# EAGLE board vader_panel (EAGLE 7.4.0)
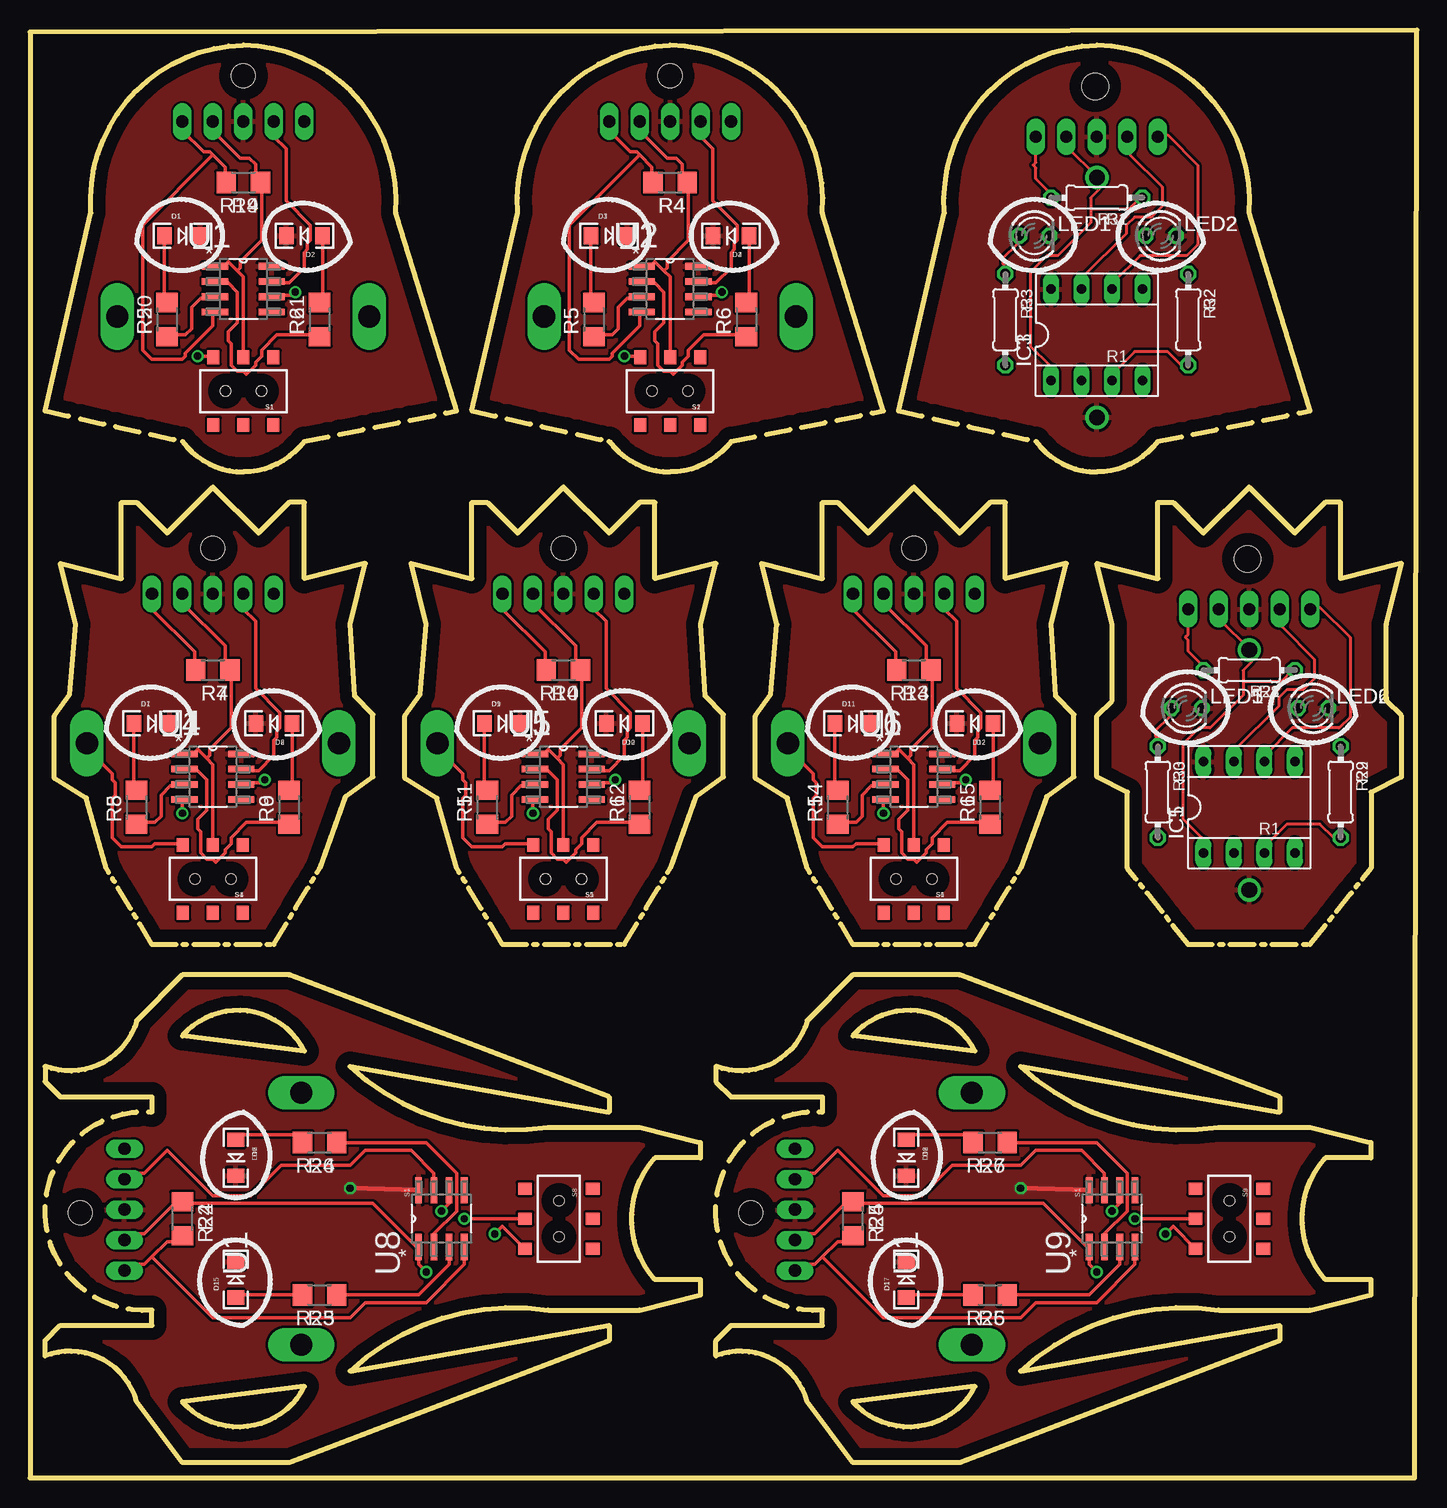
[diagram p0: board, top side]
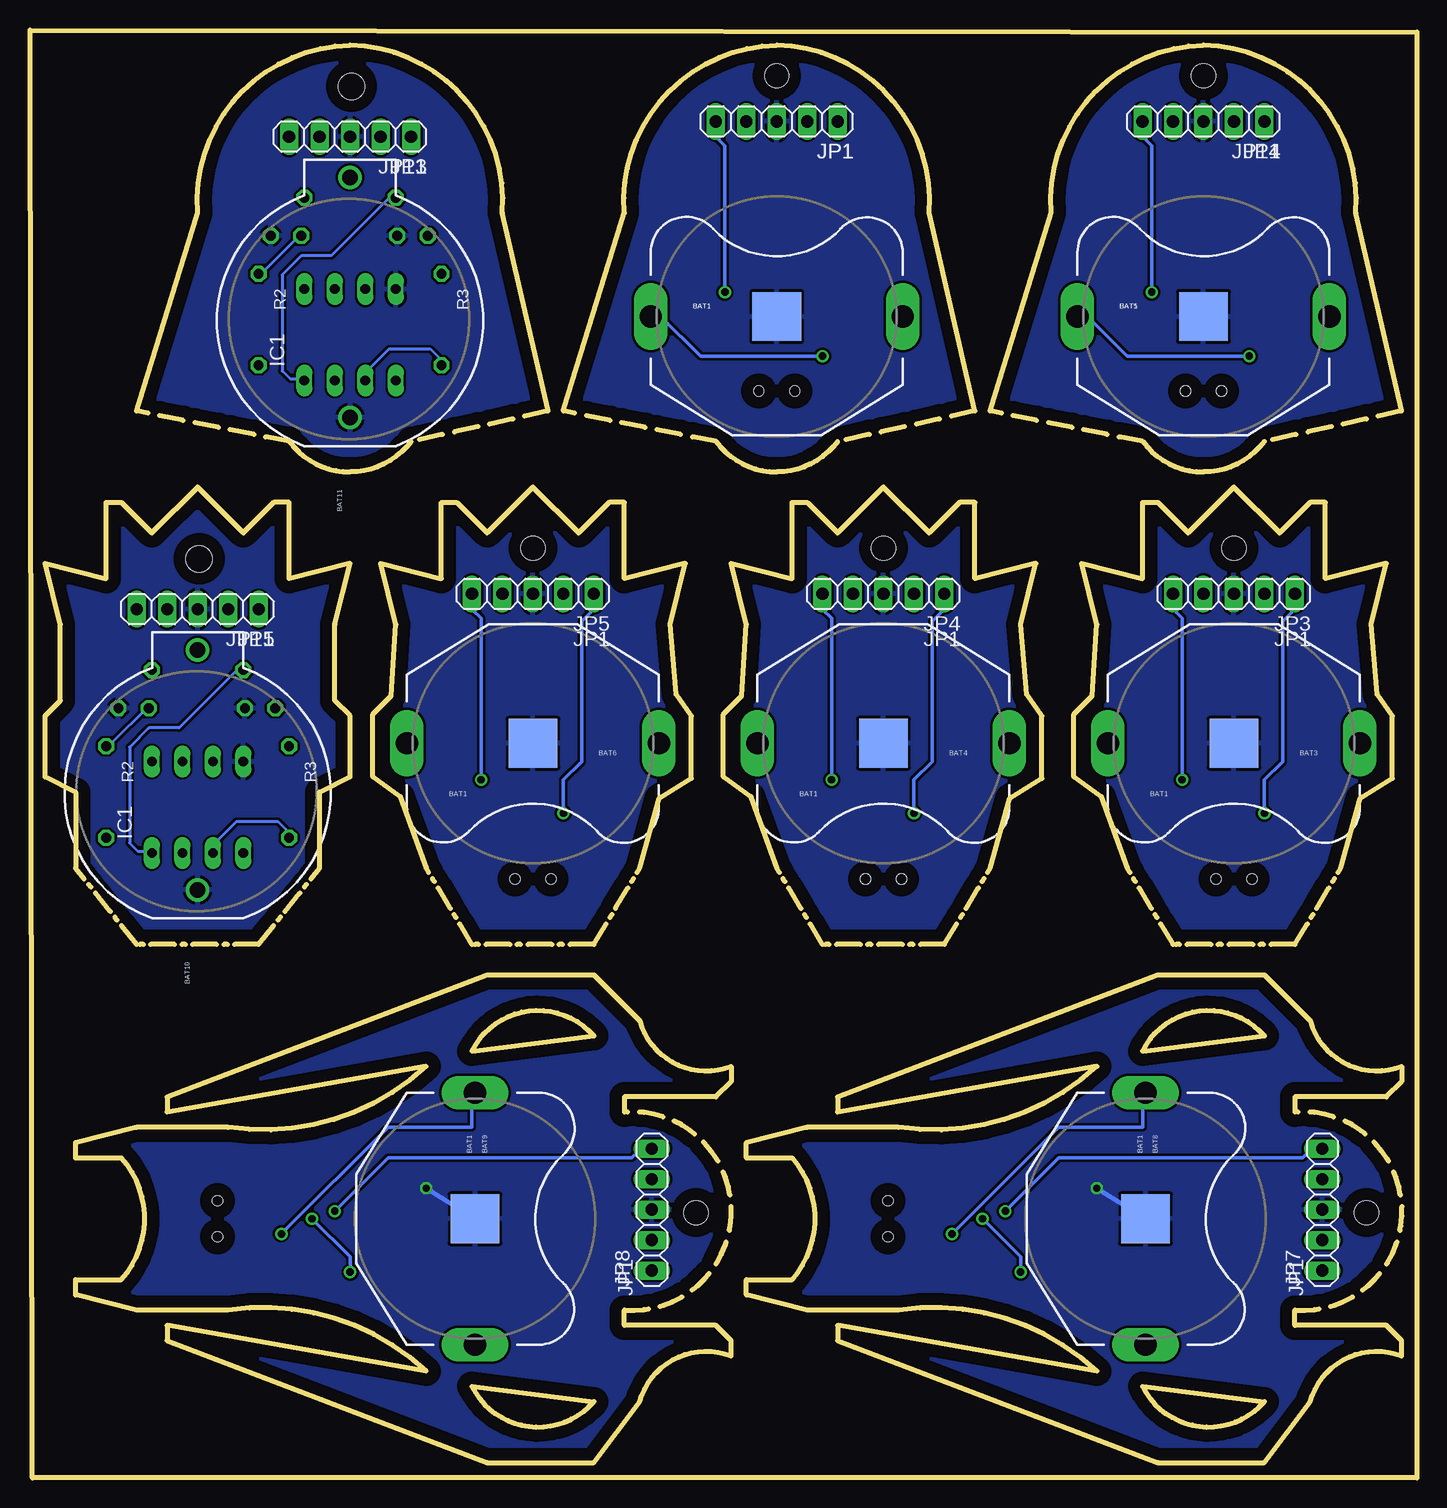
[diagram p1: board, bottom side, seen from below]

Size 115.57 x 120.65 mm. Coordinates in mm from the lower left corner, seen from the top.
Outline: 0,0 115.38,0 115.57,120.65 0,120.48 0,0
Outline: 1.27,88.9 12.7,86.36 arc53 17.78,83.82 arc53 22.86,86.36 35.56,88.9 30.48,105.41 arc93 17.78,119.38 arc93 5.08,105.41 1.27,88.9
Outline: 36.83,88.9 48.26,86.36 arc53 53.34,83.82 arc53 58.42,86.36 71.12,88.9 66.04,105.41 arc93 53.34,119.38 arc93 40.64,105.41 36.83,88.9
Outline: 27.94,76.2 22.86,74.93 22.86,81.28 21.59,81.28 19.05,78.74 15.24,82.55 11.43,78.74 8.89,81.28 7.62,81.28 7.62,74.93 2.54,76.2 3.81,71.12 3.3,65.28 2.03,63.5 2.03,58.29 4.7,56.64 6.35,50.8 10.16,44.45 20.32,44.45 24.13,50.8 26.29,56.77 28.57,58.42 28.57,63.63 27.05,65.15 26.67,71.12 27.94,76.2
Outline: 57.15,76.2 52.07,74.93 52.07,81.28 50.8,81.28 48.26,78.74 44.45,82.55 40.64,78.74 38.1,81.28 36.83,81.28 36.83,74.93 31.75,76.2 33.02,71.12 32.51,65.28 31.24,63.5 31.24,58.29 33.91,56.64 35.56,50.8 39.37,44.45 49.53,44.45 53.34,50.8 55.5,56.77 57.78,58.42 57.78,63.63 56.26,65.15 55.88,71.12 57.15,76.2
Outline: 86.36,76.2 81.28,74.93 81.28,81.28 80.01,81.28 77.47,78.74 73.66,82.55 69.85,78.74 67.31,81.28 66.04,81.28 66.04,74.93 60.96,76.2 62.23,71.12 61.72,65.28 60.45,63.5 60.45,58.29 63.12,56.64 64.77,50.8 68.58,44.45 78.74,44.45 82.55,50.8 84.71,56.77 87,58.42 87,63.63 85.47,65.15 85.09,71.12 86.36,76.2
Outline: 8.89,38.1 arc-95 1.27,34.29 1.27,33.02 2.54,31.75 10.16,31.75 10.16,30.48 arc189 10.16,13.97 10.16,12.7 2.54,12.7 1.27,11.43 1.27,10.16 arc-95 8.89,6.35 12.7,1.27 21.59,1.27 48.26,11.43 48.26,12.7 26.67,8.89 arc-51 43.18,13.97 50.8,13.97 55.88,15.24 55.88,16.51 52.07,16.51 arc-83 52.07,26.67 55.88,26.67 55.88,27.94 50.8,29.21 43.18,29.21 arc-51 26.67,34.29 48.26,30.48 48.26,31.75 21.59,41.91 12.7,41.91 8.89,38.1
Outline: 22.86,35.56 12.7,36.83 arc-112 22.86,35.56
Outline: 22.86,7.62 12.7,6.35 arc112 22.86,7.62
Outline: 64.77,38.1 arc-95 57.15,34.29 57.15,33.02 58.42,31.75 66.04,31.75 66.04,30.48 arc189 66.04,13.97 66.04,12.7 58.42,12.7 57.15,11.43 57.15,10.16 arc-95 64.77,6.35 68.58,1.27 77.47,1.27 104.14,11.43 104.14,12.7 82.55,8.89 arc-51 99.06,13.97 106.68,13.97 111.76,15.24 111.76,16.51 107.95,16.51 arc-83 107.95,26.67 111.76,26.67 111.76,27.94 106.68,29.21 99.06,29.21 arc-51 82.55,34.29 104.14,30.48 104.14,31.75 77.47,41.91 68.58,41.91 64.77,38.1
Outline: 78.74,35.56 68.58,36.83 arc-112 78.74,35.56
Outline: 78.74,7.62 68.58,6.35 arc112 78.74,7.62
Outline: 114.3,76.2 109.22,74.93 109.22,81.28 107.95,81.28 105.41,78.74 101.6,82.55 97.79,78.74 95.25,81.28 93.98,81.28 93.98,74.93 88.9,76.2 90.17,71.12 90.17,64.77 88.9,63.5 88.9,58.42 91.44,57.15 91.44,50.8 96.52,44.45 106.68,44.45 111.76,50.8 111.76,57.15 114.3,58.42 114.3,63.5 113.03,64.77 113.03,71.12 114.3,76.2
Outline: 72.39,88.9 83.82,86.36 arc53 88.9,83.82 arc53 93.98,86.36 106.68,88.9 101.6,105.41 arc93 88.9,119.38 arc93 76.2,105.41 72.39,88.9
Copper layers (1*16): Top 0.035mm / dielectric 1.5mm / Bottom 0.035mm
Design rules "default": minimum track width 10mil, minimum drill 24mil, track to track 8mil, track to pad 8mil, pad to pad 8mil, via to via 8mil, smd to smd 8mil, copper to edge 40mil, drill to drill 8mil, minimum pad ring 10mil, minimum via ring 8mil, stop-mask expansion 4mil, vias tented up to drill 0mil, thermal gap 10mil
Holes 2 mm at 17.78,116.84 53.34,116.84 15.24,77.47 44.45,77.47 73.66,77.47 4.19,22.1 60.07,22.1
Holes 2.2 mm at 101.47,76.58 88.77,115.95

## Footprints (pad centres in the part's own frame; a part is rotated, then mirrored left to right if it is on the bottom)
BATTERY_20MM_PTH_COMPACT = drill 1.854 long: 1 -10.5,0; 3 10.5,0 | smd 4.064 x 4.064: 2 0,0
BATTCOM_20MM_PTH = drill 1.3: 1 11.85,0; 2 -8.15,0
LED-1206 = smd 1.2 x 1.4: A -1.5,0; C 1.5,0
SOCKET-08 = drill 0.813 long: 1 -3.81,-3.81; 2 -1.27,-3.81; 3 1.27,-3.81; 4 3.81,-3.81; 5 3.81,3.81; 6 1.27,3.81; 7 -1.27,3.81; 8 -3.81,3.81
1X05 = drill 1.016 long: 1 -5.08,0; 2 -2.54,0; 3 0,0; 4 2.54,0; 5 5.08,0
LED3MM = drill 0.813 octagon: A -1.27,0; K 1.27,0
R1206 = smd 1.6 x 1.803: 1 -1.422,0; 2 1.422,0
0204/7 = drill 0.813 octagon: 1 -3.81,0; 2 3.81,0
AYZ0202 = smd 1 x 1.15: 1 -2.5,2.825; 2 0,2.825; 3 2.5,2.825; 4 -2.5,-2.825; 5 0,-2.825; 6 2.5,-2.825 | hole 0.85: 1.5,0; -1.5,0
SOIC127P600X175-8N = smd 2.184 x 0.559: 1 -2.362,1.905; 2 -2.362,0.635; 3 -2.362,-0.635; 4 -2.362,-1.905; 5 2.362,-1.905; 6 2.362,-0.635; 7 2.362,0.635; 8 2.362,1.905

## Placement (x,y rotation side)
BAT1  [BATTERY_20MM_PTH_COMPACT]  53.34,96.77 0 bottom
BAT3  [BATTERY_20MM_PTH_COMPACT]  15.24,61.21 180 bottom
BAT4  [BATTERY_20MM_PTH_COMPACT]  44.45,61.21 180 bottom
BAT5  [BATTERY_20MM_PTH_COMPACT]  17.78,96.77 0 bottom
BAT6  [BATTERY_20MM_PTH_COMPACT]  73.66,61.21 180 bottom
BAT8  [BATTERY_20MM_PTH_COMPACT]  22.61,21.59 270 bottom
BAT9  [BATTERY_20MM_PTH_COMPACT]  78.49,21.59 270 bottom
BAT10  [BATTCOM_20MM_PTH]  101.6,57.15 90 bottom
BAT11  [BATTCOM_20MM_PTH]  88.9,96.52 90 bottom
D1  [LED-1206]  12.7,103.5 0 top
D2  [LED-1206]  22.86,103.5 180 top
D3  [LED-1206]  48.26,103.5 0 top
D4  [LED-1206]  58.42,103.5 180 top
D7  [LED-1206]  10.16,62.86 0 top
D8  [LED-1206]  20.32,62.86 180 top
D9  [LED-1206]  39.37,62.86 0 top
D10  [LED-1206]  49.53,62.86 180 top
D11  [LED-1206]  68.58,62.86 0 top
D12  [LED-1206]  78.74,62.86 180 top
D15  [LED-1206]  17.14,16.51 90 top
D16  [LED-1206]  17.14,26.67 270 top
D17  [LED-1206]  73.03,16.51 90 top
D18  [LED-1206]  73.03,26.67 270 top
IC3  [SOCKET-08]  88.9,95.25 0 top
IC5  [SOCKET-08]  101.6,55.88 0 top
JP1  [1X05]  53.34,113.03 180 bottom
JP3  [1X05]  15.24,73.66 180 bottom
JP4  [1X05]  44.45,73.66 180 bottom
JP5  [1X05]  73.66,73.66 180 bottom
JP7  [1X05]  7.87,22.35 90 bottom
JP8  [1X05]  63.75,22.35 90 bottom
JP13  [1X05]  88.9,111.76 180 bottom
JP14  [1X05]  17.78,113.03 180 bottom
JP15  [1X05]  101.6,72.39 180 bottom
LED1  [LED3MM]  83.69,103.5 0 top
LED2  [LED3MM]  94.23,103.5 0 top
LED5  [LED3MM]  96.39,64.14 0 top
LED6  [LED3MM]  106.93,64.14 0 top
R4  [R1206]  53.34,107.95 180 top
R5  [R1206]  46.99,96.52 90 top
R6  [R1206]  59.69,96.52 90 top
R7  [R1206]  15.24,67.31 180 top
R8  [R1206]  8.89,55.88 90 top
R9  [R1206]  21.59,55.88 90 top
R10  [R1206]  44.45,67.31 180 top
R11  [R1206]  38.1,55.88 90 top
R12  [R1206]  50.8,55.88 90 top
R13  [R1206]  73.66,67.31 180 top
R14  [R1206]  67.31,55.88 90 top
R15  [R1206]  80.01,55.88 90 top
R19  [R1206]  17.78,107.95 180 top
R20  [R1206]  11.43,96.52 90 top
R21  [R1206]  24.13,96.52 90 top
R22  [R1206]  12.7,21.59 270 top
R23  [R1206]  24.13,15.24 180 top
R24  [R1206]  24.13,27.94 180 top
R25  [R1206]  68.58,21.59 270 top
R26  [R1206]  80.01,15.24 180 top
R27  [R1206]  80.01,27.94 180 top
R28  [0204/7]  101.6,67.31 180 top
R29  [0204/7]  109.22,57.15 270 top
R30  [0204/7]  93.98,57.15 270 top
R31  [0204/7]  88.9,106.68 180 top
R32  [0204/7]  96.52,96.52 270 top
R33  [0204/7]  81.28,96.52 270 top
S1  AYZ0202  [AYZ0202]  17.78,90.55 180 top
S2  AYZ0202  [AYZ0202]  53.34,90.55 180 top
S4  AYZ0202  [AYZ0202]  15.24,49.91 180 top
S5  AYZ0202  [AYZ0202]  44.45,49.91 180 top
S6  AYZ0202  [AYZ0202]  73.66,49.91 180 top
S8  AYZ0202  [AYZ0202]  44.07,21.59 270 top
S9  AYZ0202  [AYZ0202]  99.95,21.59 270 top
U1  PIC12F1822-I/SN  [SOIC127P600X175-8N]  17.78,99.06 0 top
U2  PIC12F1822-I/SN  [SOIC127P600X175-8N]  53.34,99.06 0 top
U4  PIC12F1822-I/SN  [SOIC127P600X175-8N]  15.24,58.42 0 top
U5  PIC12F1822-I/SN  [SOIC127P600X175-8N]  44.45,58.42 0 top
U6  PIC12F1822-I/SN  [SOIC127P600X175-8N]  73.66,58.42 0 top
U8  PIC12F1822-I/SN  [SOIC127P600X175-8N]  34.29,21.59 90 top
U9  PIC12F1822-I/SN  [SOIC127P600X175-8N]  90.17,21.59 90 top

## Library data of the parts
BAT1 BAT3-BAT6 BAT8-BAT11 = SparkFun-Electromechanical
D1-D4 D7-D12 D15-D18 = SparkFun-LED
IC3 IC5 = ic-package
JP1 JP3-JP5 JP7 JP8 JP13-JP15 = pinhead
LED1 LED2 LED5 LED6 = led
R4-R15 R19-R33 = resistor
S1 S2 S4-S6 S8 S9 = SparkFun-Electromechanical; PROD_ID: SWCH-08179
U1 U2 U4-U6 U8 U9 = PIC12F1822ISN; MPN: PIC12F1822-I/SN; OC_FARNELL: 1971857; OC_NEWARK: 53R0197; PACKAGE: SOIC-8; SUPPLIER: Microchip

## Nets
GND: BAT1.2 D3.C D4.C JP1.3 U2.8
GND2: BAT3.2 D7.C D8.C JP3.3 U4.8
GND3: BAT4.2 D9.C D10.C JP4.3 U5.8
GND4: BAT5.2 D1.C D2.C JP14.3 U1.8
GND5: BAT6.2 D11.C D12.C JP5.3 U6.8
GND7: BAT8.2 D15.C D16.C JP7.3 U8.8
GND8: BAT9.2 D17.C D18.C JP8.3 U9.8
GND9: BAT10.2 IC5.8 JP15.3 LED5.K LED6.K
GND10: BAT11.2 IC3.8 JP13.3 LED1.K LED2.K
ICSPCLK: JP1.5 U2.6
ICSPCLK2: JP3.5 U4.6
ICSPCLK3: JP4.5 U5.6
ICSPCLK4: JP14.5 U1.6
ICSPCLK5: JP5.5 U6.6
ICSPCLK7: JP7.5 U8.6
ICSPCLK8: JP8.5 U9.6
ICSPCLK9: IC5.6 JP15.5
ICSPCLK10: IC3.6 JP13.5
ICSPDAT: JP1.4 U2.7
ICSPDAT2: JP3.4 U4.7
ICSPDAT3: JP4.4 U5.7
ICSPDAT4: JP14.4 U1.7
ICSPDAT5: JP5.4 U6.7
ICSPDAT7: JP7.4 U8.7
ICSPDAT8: JP8.4 U9.7
ICSPDAT9: IC5.7 JP15.4
ICSPDAT10: IC3.7 JP13.4
N$1: BAT1.1 S2.6
N$4: R6.1 U2.2
N$5: R5.1 U2.3
N$6: D4.A R6.2
N$7: D3.A R5.2
N$11: R9.1 U4.2
N$12: R8.1 U4.3
N$13: D8.A R9.2
N$14: D7.A R8.2
N$15: BAT3.1 S4.6
N$16: R12.1 U5.2
N$17: R11.1 U5.3
N$18: D10.A R12.2
N$19: D9.A R11.2
N$20: BAT4.1 S5.6
N$21: R15.1 U6.2
N$22: R21.1 U1.2
N$23: R20.1 U1.3
N$24: D2.A R21.2
N$25: D1.A R20.2
N$26: BAT5.1 S1.6
N$27: R14.1 U6.3
N$29: D12.A R15.2
N$30: D11.A R14.2
N$31: BAT6.1 S6.6
N$37: R24.1 U8.2
N$38: R23.1 U8.3
N$39: D16.A R24.2
N$40: D15.A R23.2
N$41: BAT8.1 S8.6
N$42: R27.1 U9.2
N$43: R26.1 U9.3
N$44: D18.A R27.2
N$45: D17.A R26.2
N$46: BAT9.1 S9.6
N$47: IC5.4 JP15.1 R28.2
N$48: IC5.3 R29.2
N$49: IC5.2 R30.2
N$50: LED5.A R30.1
N$51: LED6.A R29.1
N$52: IC3.4 JP13.1 R31.2
N$53: IC3.3 R32.2
N$54: IC3.2 R33.2
N$55: LED1.A R33.1
N$56: LED2.A R32.1
VDD: JP1.2 R4.1 S2.5 U2.1
VDD2: JP3.2 R7.1 S4.5 U4.1
VDD3: JP4.2 R10.1 S5.5 U5.1
VDD4: JP14.2 R19.1 S1.5 U1.1
VDD5: JP5.2 R13.1 S6.5 U6.1
VDD7: JP7.2 R22.1 S8.5 U8.1
VDD8: JP8.2 R25.1 S9.5 U9.1
VDD9: BAT10.1 IC5.1 JP15.2 R28.1
VDD10: BAT11.1 IC3.1 JP13.2 R31.1
VPP: JP14.1 R19.2 U1.4
VPP1: JP1.1 R4.2 U2.4
VPP3: JP3.1 R7.2 U4.4
VPP4: JP4.1 R10.2 U5.4
VPP5: JP5.1 R13.2 U6.4
VPP7: JP7.1 R22.2 U8.4
VPP8: JP8.1 R25.2 U9.4

## Tracks (layer width: path | path; a pad name or v marks a point on that pad's centre or on a via)
GND
  pour Top: 36.83,83.82 71.12,83.82 71.12,119.38 36.83,119.38
  pour Bottom: 71.12,83.82 36.83,83.82 36.83,119.38 71.12,119.38
GND2
  pour Top: 1.27,43.18 29.21,43.18 29.21,82.55 1.27,82.55
  pour Bottom: 29.21,43.18 1.27,43.18 1.27,82.55 29.21,82.55
GND3
  pour Top: 30.48,43.18 58.42,43.18 58.42,82.55 30.48,82.55
  pour Bottom: 58.42,43.18 30.48,43.18 30.48,82.55 58.42,82.55
GND4
  pour Top: 1.27,83.82 35.56,83.82 35.56,119.38 1.27,119.38
  pour Bottom: 35.56,83.82 1.27,83.82 1.27,119.38 35.56,119.38
GND5
  pour Top: 59.69,43.18 87.63,43.18 87.63,82.55 59.69,82.55
  pour Bottom: 87.63,43.18 59.69,43.18 59.69,82.55 87.63,82.55
GND7  (via drill 0.6)
  Top 0.406: U8.8 v26.67,24.13
  Bottom 0.406: v26.67,24.13 BAT8.2
  pour Top: 55.88,1.27 55.88,41.91 1.27,41.91 1.27,1.27
  pour Bottom: 55.88,41.91 55.88,1.27 1.27,1.27 1.27,41.91
GND8  (via drill 0.6)
  Top 0.406: U9.8 v82.55,24.13
  Bottom 0.406: v82.55,24.13 BAT9.2
  pour Top: 111.76,1.27 111.76,41.91 57.15,41.91 57.15,1.27
  pour Bottom: 111.76,41.91 111.76,1.27 57.15,1.27 57.15,41.91
GND9
  pour Top: 88.9,44.45 114.3,44.45 114.3,82.55 88.9,82.55
  pour Bottom: 88.9,44.45 114.3,44.45 114.3,82.55 88.9,82.55
GND10
  pour Top: 72.39,83.82 106.68,83.82 106.68,119.38 72.39,119.38
  pour Bottom: 72.39,83.82 106.68,83.82 106.68,119.38 72.39,119.38
ICSPCLK  (via drill 0.61)
  Top 0.305: v57.66,98.81 57.4,98.55 55.88,98.55 U2.6
  Bottom 0.305: v57.66,98.81 57.66,111 58.42,111.76 JP1.5
ICSPCLK2  (via drill 0.61)
  Top 0.305: v19.56,58.17 19.3,57.91 17.78,57.91 U4.6
  Bottom 0.305: v19.56,58.17 19.56,71.63 20.32,72.39 JP3.5
ICSPCLK3  (via drill 0.61)
  Top 0.305: v48.77,58.17 48.51,57.91 46.99,57.91 U5.6
  Bottom 0.305: v48.77,58.17 48.77,71.63 49.53,72.39 JP4.5
ICSPCLK4  (via drill 0.61)
  Top 0.305: v22.1,98.81 21.84,98.55 20.32,98.55 U1.6
  Bottom 0.305: v22.1,98.81 22.1,111 22.86,111.76 JP14.5
ICSPCLK5  (via drill 0.61)
  Top 0.305: v77.98,58.17 77.72,57.91 76.2,57.91 U6.6
  Bottom 0.305: v77.98,58.17 77.98,71.63 78.74,72.39 JP5.5
ICSPCLK7  (via drill 0.61)
  Top 0.305: U8.6 34.92,22.86 v34.29,22.23
  Bottom 0.305: v34.29,22.23 29.84,26.67 9.53,26.67 8.26,27.94 JP7.5
ICSPCLK8  (via drill 0.61)
  Top 0.305: U9.6 90.81,22.86 v90.17,22.23
  Bottom 0.305: v90.17,22.23 85.73,26.67 65.41,26.67 64.14,27.94 JP8.5
ICSPCLK9
  Top 0.254: IC5.6 102.92,59.74 102.92,60.2 105.21,62.48 109.09,62.48 110.01,63.4 110.01,70.03 107.49,72.54 106.81,72.54 JP15.5
ICSPCLK10
  Top 0.254: IC3.6 90.22,99.11 90.22,99.57 92.51,101.85 96.39,101.85 97.31,102.77 97.31,109.4 94.79,111.91 94.11,111.91 JP13.5
ICSPDAT
  Top 0.305: JP1.4 55.88,111.76 56.9,110.74 56.9,106.43 58.93,104.39 58.93,103.12 58.67,102.87 58.67,102.36 58.42,102.11 58.42,100.84 57.15,99.57 55.88,99.57 U2.7
ICSPDAT2
  Top 0.305: JP3.4 17.78,72.39 18.8,71.37 18.8,65.79 20.83,63.75 20.83,62.48 20.57,62.23 20.57,61.72 20.32,61.47 20.32,60.2 19.05,58.93 17.78,58.93 U4.7
ICSPDAT3
  Top 0.305: JP4.4 46.99,72.39 48.01,71.37 48.01,65.79 50.04,63.75 50.04,62.48 49.78,62.23 49.78,61.72 49.53,61.47 49.53,60.2 48.26,58.93 46.99,58.93 U5.7
ICSPDAT4
  Top 0.305: JP14.4 20.32,111.76 21.34,110.74 21.34,106.43 23.37,104.39 23.37,103.12 23.11,102.87 23.11,102.36 22.86,102.11 22.86,100.84 21.59,99.57 20.32,99.57 U1.7
ICSPDAT5
  Top 0.305: JP5.4 76.2,72.39 77.22,71.37 77.22,65.79 79.25,63.75 79.25,62.48 78.99,62.23 78.99,61.72 78.74,61.47 78.74,60.2 77.47,58.93 76.2,58.93 U6.7
ICSPDAT7
  Top 0.305: U8.7 33.65,25.4 31.75,27.3 27.94,27.3 26.67,26.04 20.96,26.04 18.41,23.5 15.24,23.5 11.43,27.3 9.53,25.4 8.26,25.4 JP7.4
ICSPDAT8
  Top 0.305: U9.7 89.54,25.4 87.63,27.3 83.82,27.3 82.55,26.04 76.84,26.04 74.3,23.5 71.12,23.5 67.31,27.3 65.41,25.4 64.14,25.4 JP8.4
ICSPDAT9
  Top 0.254: IC5.7 100.41,59.74 100.41,60.66 104.06,64.31 104.06,65 104.75,65.68 106.12,65.68 107.04,66.6 107.04,68.2 104.29,70.94 104.29,72.31 JP15.4
ICSPDAT10
  Top 0.254: IC3.7 87.71,99.11 87.71,100.02 91.36,103.68 91.36,104.37 92.05,105.05 93.42,105.05 94.34,105.97 94.34,107.57 91.59,110.31 91.59,111.68 JP13.4
N$1  (via drill 0.61)
  Top 0.305: v49.53,93.47 50.8,93.47 S2.6
  Bottom 0.305: v49.53,93.47 59.69,93.47 62.99,96.77 BAT1.1
N$4
  Top 0.305: R6.1 59.69,95.25 56.13,95.25 54.86,93.98 54.86,93.47 54.36,92.96 54.36,92.71 53.59,91.95 53.34,92.2 52.83,92.2 52.32,92.71 52.32,94.49 52.07,94.74 52.07,95.5 52.83,96.27 52.83,98.81 52.07,99.57 51.05,99.57 U2.2
N$5
  Top 0.305: R5.1 46.99,95.25 48.51,95.25 49.02,95.76 49.02,97.54 49.78,98.3 50.8,98.3 U2.3
N$6
  Top 0.305: D4.A 59.94,103.38 59.94,98.3 59.69,98.04 R6.2
N$7
  Top 0.305: D3.A 46.74,103.38 46.74,98.3 46.99,98.04 R5.2
N$11
  Top 0.305: R9.1 21.59,54.61 18.03,54.61 16.76,53.34 16.76,52.83 16.26,52.32 16.26,52.07 15.49,51.31 15.24,51.56 14.73,51.56 14.22,52.07 14.22,53.85 13.97,54.1 13.97,54.86 14.73,55.63 14.73,58.17 13.97,58.93 12.95,58.93 U4.2
N$12
  Top 0.305: R8.1 8.89,54.61 10.41,54.61 10.92,55.12 10.92,56.9 11.68,57.66 12.7,57.66 U4.3
N$13
  Top 0.305: D8.A 21.84,62.74 21.84,57.66 21.59,57.4 R9.2
N$14
  Top 0.305: D7.A 8.64,62.74 8.64,57.66 8.89,57.4 R8.2
N$15
  Top 0.305: S4.6 12.7,52.83 10.41,52.83 10.16,52.58 7.62,52.58 6.86,53.34 6.86,56.64 7.11,56.9 7.11,57.91 6.86,58.17 6.86,58.67 4.83,60.71 4.83,61.21 BAT3.1
N$16
  Top 0.305: R12.1 50.8,54.61 47.24,54.61 45.97,53.34 45.97,52.83 45.47,52.32 45.47,52.07 44.7,51.31 44.45,51.56 43.94,51.56 43.43,52.07 43.43,53.85 43.18,54.1 43.18,54.86 43.94,55.63 43.94,58.17 43.18,58.93 42.16,58.93 U5.2
N$17
  Top 0.305: R11.1 38.1,54.61 39.62,54.61 40.13,55.12 40.13,56.9 40.89,57.66 41.91,57.66 U5.3
N$18
  Top 0.305: D10.A 51.05,62.74 51.05,57.66 50.8,57.4 R12.2
N$19
  Top 0.305: D9.A 37.85,62.74 37.85,57.66 38.1,57.4 R11.2
N$20
  Top 0.305: S5.6 41.91,52.83 39.62,52.83 39.37,52.58 36.83,52.58 36.07,53.34 36.07,56.64 36.32,56.9 36.32,57.91 36.07,58.17 36.07,58.67 34.04,60.71 34.04,61.21 BAT4.1
N$21
  Top 0.305: R15.1 80.01,54.61 76.45,54.61 75.18,53.34 75.18,52.83 74.68,52.32 74.68,52.07 73.91,51.31 73.66,51.56 73.15,51.56 72.64,52.07 72.64,53.85 72.39,54.1 72.39,54.86 73.15,55.63 73.15,58.17 72.39,58.93 71.37,58.93 U6.2
N$22
  Top 0.305: R21.1 24.13,95.25 20.57,95.25 19.3,93.98 19.3,93.47 18.8,92.96 18.8,92.71 18.03,91.95 17.78,92.2 17.27,92.2 16.76,92.71 16.76,94.49 16.51,94.74 16.51,95.5 17.27,96.27 17.27,98.81 16.51,99.57 15.49,99.57 U1.2
N$23
  Top 0.305: R20.1 11.43,95.25 12.95,95.25 13.46,95.76 13.46,97.54 14.22,98.3 15.24,98.3 U1.3
N$24
  Top 0.305: D2.A 24.38,103.38 24.38,98.3 24.13,98.04 R21.2
N$25
  Top 0.305: D1.A 11.18,103.38 11.18,98.3 11.43,98.04 R20.2
N$26  (via drill 0.61)
  Top 0.305: v13.97,93.47 15.24,93.47 S1.6
  Bottom 0.305: v13.97,93.47 24.13,93.47 27.43,96.77 BAT5.1
N$27
  Top 0.305: R14.1 67.31,54.61 68.83,54.61 69.34,55.12 69.34,56.9 70.1,57.66 71.12,57.66 U6.3
N$29
  Top 0.305: D12.A 80.26,62.74 80.26,57.66 80.01,57.4 R15.2
N$30
  Top 0.305: D11.A 67.06,62.74 67.06,57.66 67.31,57.4 R14.2
N$31
  Top 0.305: S6.6 71.12,52.83 68.83,52.83 68.58,52.58 66.04,52.58 65.28,53.34 65.28,56.64 65.53,56.9 65.53,57.91 65.28,58.17 65.28,58.67 63.25,60.71 63.25,61.21 BAT6.1
N$37
  Top 0.305: R24.1 33.02,27.94 35.56,25.4 35.56,22.23 33.65,20.32 U8.2
N$38
  Top 0.305: R23.1 32.38,15.24 34.92,17.78 U8.3
N$39
  Top 0.305: D16.A 17.14,28.58 22.23,28.58 22.86,27.94 R24.2
N$40
  Top 0.305: R23.2 17.14,15.24 D15.A
N$41  (via drill 0.61)
  Top 0.305: v38.73,20.32 39.37,20.96 41.27,19.05 S8.6
  Bottom 0.305: v38.73,20.32 29.84,29.21 22.86,29.21 22.86,31.75 BAT8.1
N$42
  Top 0.305: R27.1 88.9,27.94 91.44,25.4 91.44,22.23 89.54,20.32 U9.2
N$43
  Top 0.305: R26.1 88.27,15.24 90.81,17.78 U9.3
N$44
  Top 0.305: D18.A 73.03,28.58 78.11,28.58 78.74,27.94 R27.2
N$45
  Top 0.305: R26.2 73.03,15.24 D17.A
N$46  (via drill 0.61)
  Top 0.305: v94.62,20.32 95.25,20.96 97.16,19.05 S9.6
  Bottom 0.305: v94.62,20.32 85.73,29.21 78.74,29.21 78.74,31.75 BAT9.1
N$47
  Top 0.254: JP15.1 96.52,70.26 96.29,70.03 96.52,69.8 96.52,68.89 97.89,67.51 R28.2
  Bottom 0.254: IC5.4 105.44,52.2 106.58,52.2 107.26,52.88 107.26,60.88 105.66,62.48 103.15,62.48 98.35,67.28 97.89,67.28 R28.2
N$48
  Top 0.254: R29.2 108.64,53.34 107.49,54.48 104.75,54.48 102.92,52.65 102.92,52.2 IC5.3
N$49
  Bottom 0.254: R30.2 94.01,53.34 94.01,53.8 94.92,54.71 98.35,54.71 100.18,52.88 100.18,52.2 IC5.2
N$50
  Top 0.254: R30.1 94.01,61.11 94.01,61.57 93.78,61.8 93.78,62.25 94.92,63.4 94.92,64.08 LED5.A
N$51
  Bottom 0.254: R29.1 109.09,61.11 108.86,61.11 105.66,64.31 LED6.A
N$52
  Top 0.254: JP13.1 83.82,109.63 83.59,109.4 83.82,109.17 83.82,108.25 85.19,106.88 R31.2
  Bottom 0.254: IC3.4 92.73,91.57 93.88,91.57 94.56,92.25 94.56,100.25 92.96,101.85 90.45,101.85 85.65,106.66 85.19,106.66 R31.2
N$53
  Top 0.254: R32.2 95.94,92.71 94.79,93.85 92.05,93.85 90.22,92.02 90.22,91.57 IC3.3
N$54
  Bottom 0.254: R33.2 81.31,92.71 81.31,93.17 82.22,94.08 85.65,94.08 87.48,92.25 87.48,91.57 IC3.2
N$55
  Top 0.254: R33.1 81.31,100.48 81.31,100.94 81.08,101.17 81.08,101.62 82.22,102.77 82.22,103.45 LED1.A
N$56
  Bottom 0.254: R32.1 96.39,100.48 96.16,100.48 92.96,103.68 LED2.A
VDD
  Top 0.305: S2.5 53.34,100.08 52.83,100.58 | 52.83,100.58 52.07,101.35 51.56,100.84 51.05,100.84 U2.1 | 52.83,100.58 53.09,100.84 53.09,101.35 54.86,103.12 54.86,107.95 R4.1 54.61,107.95 54.36,108.2 54.36,109.47 53.85,109.98 53.09,109.98 50.8,112.27 JP1.2
VDD2
  Top 0.305: S4.5 15.24,59.44 14.73,59.94 | 14.73,59.94 13.97,60.71 13.46,60.2 12.95,60.2 U4.1 | 14.73,59.94 14.99,60.2 14.99,60.71 16.76,62.48 16.76,67.31 R7.1 16.51,67.31 16.26,67.56 16.26,69.34 12.7,72.9 JP3.2
VDD3
  Top 0.305: S5.5 44.45,59.44 43.94,59.94 | 43.94,59.94 43.18,60.71 42.67,60.2 42.16,60.2 U5.1 | 43.94,59.94 44.2,60.2 44.2,60.71 45.97,62.48 45.97,67.31 R10.1 45.72,67.31 45.47,67.56 45.47,69.34 41.91,72.9 JP4.2
VDD4
  Top 0.305: S1.5 17.78,100.08 17.27,100.58 | 17.27,100.58 16.51,101.35 16,100.84 15.49,100.84 U1.1 | 17.27,100.58 17.53,100.84 17.53,101.35 19.3,103.12 19.3,107.95 R19.1 19.05,107.95 18.8,108.2 18.8,109.47 18.29,109.98 17.53,109.98 15.24,112.27 JP14.2
VDD5
  Top 0.305: S6.5 73.66,59.44 73.15,59.94 | 73.15,59.94 72.39,60.71 71.88,60.2 71.37,60.2 U6.1 | 73.15,59.94 73.41,60.2 73.41,60.71 75.18,62.48 75.18,67.31 R13.1 74.93,67.31 74.68,67.56 74.68,69.34 71.12,72.9 JP5.2
VDD7  (via drill 0.61)
  Top 0.305: 12.7,22.86 12.07,22.86 9.53,20.32 8.26,20.32 JP7.2 | v36.2,21.59 S8.5 41.27,21.59 | v33.02,17.15 32.38,17.78 32.38,19.05 | 12.7,22.86 28.57,22.86 32.38,19.05 | 12.7,22.86 R22.1 | 32.38,19.05 U8.1
  Bottom 0.305: v36.2,21.59 33.02,18.41 v33.02,17.15
VDD8  (via drill 0.61)
  Top 0.305: 68.58,22.86 67.95,22.86 65.41,20.32 64.14,20.32 JP8.2 | v92.08,21.59 S9.5 97.16,21.59 | v88.9,17.15 88.27,17.78 88.27,19.05 | 68.58,22.86 84.45,22.86 88.27,19.05 | 68.58,22.86 R25.1 | 88.27,19.05 U9.1
  Bottom 0.305: v92.08,21.59 88.9,18.41 v88.9,17.15
VDD9
  Top 0.254: 101.09,66.37 101.09,67.28 101.78,67.97 101.78,68.89 BAT10.1 101.55,69.11 99.26,71.4 99.26,72.31 JP15.2 | 101.09,66.37 101.09,65.23 98.35,62.48 97.43,62.48 96.06,61.11 96.06,54.94 97.66,53.34 97.66,52.2 IC5.1 | 101.09,66.37 104.29,66.37 105.21,67.28 R28.1
VDD10
  Top 0.254: 88.39,105.74 88.39,106.66 89.08,107.34 89.08,108.25 BAT11.1 88.85,108.48 86.56,110.77 86.56,111.68 JP13.2 | 88.39,105.74 88.39,104.6 85.65,101.85 84.73,101.85 83.36,100.48 83.36,94.31 84.96,92.71 84.96,91.57 IC3.1 | 88.39,105.74 91.59,105.74 92.51,106.66 R31.1
VPP
  Top 0.305: 15.24,110.24 14.99,110.49 14.48,110.49 12.7,112.27 JP14.1 | 15.24,110.24 16.26,109.22 16.26,107.95 R19.2 | 15.24,110.24 9.4,104.39 9.4,93.98 10.16,93.22 12.7,93.22 12.95,93.47 12.95,93.73 15.24,96.01 15.24,97.03 U1.4
VPP1
  Top 0.305: 50.8,110.24 50.55,110.49 50.04,110.49 48.26,112.27 JP1.1 | 50.8,110.24 51.82,109.22 51.82,107.95 R4.2 | 50.8,110.24 44.96,104.39 44.96,93.98 45.72,93.22 48.26,93.22 48.51,93.47 48.51,93.73 50.8,96.01 50.8,97.03 U2.4
VPP3  (via drill 0.61)
  Top 0.305: JP3.1 10.16,72.39 13.72,68.83 13.72,67.31 R7.2 | v12.7,55.37 12.7,56.39 U4.4
  Bottom 0.305: v12.7,55.37 12.7,58.17 11.18,59.69 11.18,71.37 10.16,72.39 JP3.1
VPP4  (via drill 0.61)
  Top 0.305: JP4.1 39.37,72.39 42.93,68.83 42.93,67.31 R10.2 | v41.91,55.37 41.91,56.39 U5.4
  Bottom 0.305: v41.91,55.37 41.91,58.17 40.39,59.69 40.39,71.37 39.37,72.39 JP4.1
VPP5  (via drill 0.61)
  Top 0.305: JP5.1 68.58,72.39 72.14,68.83 72.14,67.31 R13.2 | v71.12,55.37 71.12,56.39 U6.4
  Bottom 0.305: v71.12,55.37 71.12,58.17 69.6,59.69 69.6,71.37 68.58,72.39 JP5.1
VPP7
  Top 0.305: 10.16,18.41 9.53,17.78 8.26,17.78 JP7.1 | 10.16,18.41 11.43,19.69 12.7,19.69 R22.2 | U8.4 36.2,17.78 33.02,14.61 27.94,14.61 26.67,13.34 15.24,13.34 10.16,18.41
VPP8
  Top 0.305: 66.04,18.41 65.41,17.78 64.14,17.78 JP8.1 | 66.04,18.41 67.31,19.69 68.58,19.69 R25.2 | U9.4 92.08,17.78 88.9,14.61 83.82,14.61 82.55,13.34 71.12,13.34 66.04,18.41

## Text on the board
_tNames: R4 | R4 | D1 | D1 | R1 | LED1 | LED1 | LED2 | LED2 | U1 | U1 | D2 | D2 | R3 | R2 | R5 | R6 | R5 | R6 | R1 | IC1 | S1 | S1 | R4 | R4 | R4 | R1 | LED1 | LED1 | LED2 | LED2 | D1 | D1 | D1 | U1 | D2 | U1 | D2 | U1 | D2 | R3 | R2 | R5 | R6 | R5 | R6 | R5 | R6 | R1 | IC1 | S1 | S1 | S1 | D2 | D2 | R6 | R6 | S1 | S1 | R4 | R4 | U1 | U1 | D1 | D1 | R5 | R5
_bNames: JP1 | JP1 | JP1 | R3 | R2 | BAT1 | BAT1 | IC1 | JP1 | JP1 | JP1 | JP1 | R3 | R2 | BAT1 | BAT1 | BAT1 | IC1 | BAT1 | BAT1 | JP1 | JP1